# Altium PCB PCB_国产飞控-led端子-copy-copy_2026-03-31.pcbdoc (part 1 of 3)
Units mil, origin at the board's own origin, x right, y up, seen from the top; angles counter-clockwise.
Board outline 3997.5 x 3500.13 mil, 2 copper layers (Top Layer, Bottom Layer); 108 components, 113 nets, 523 pads, 148 vias.
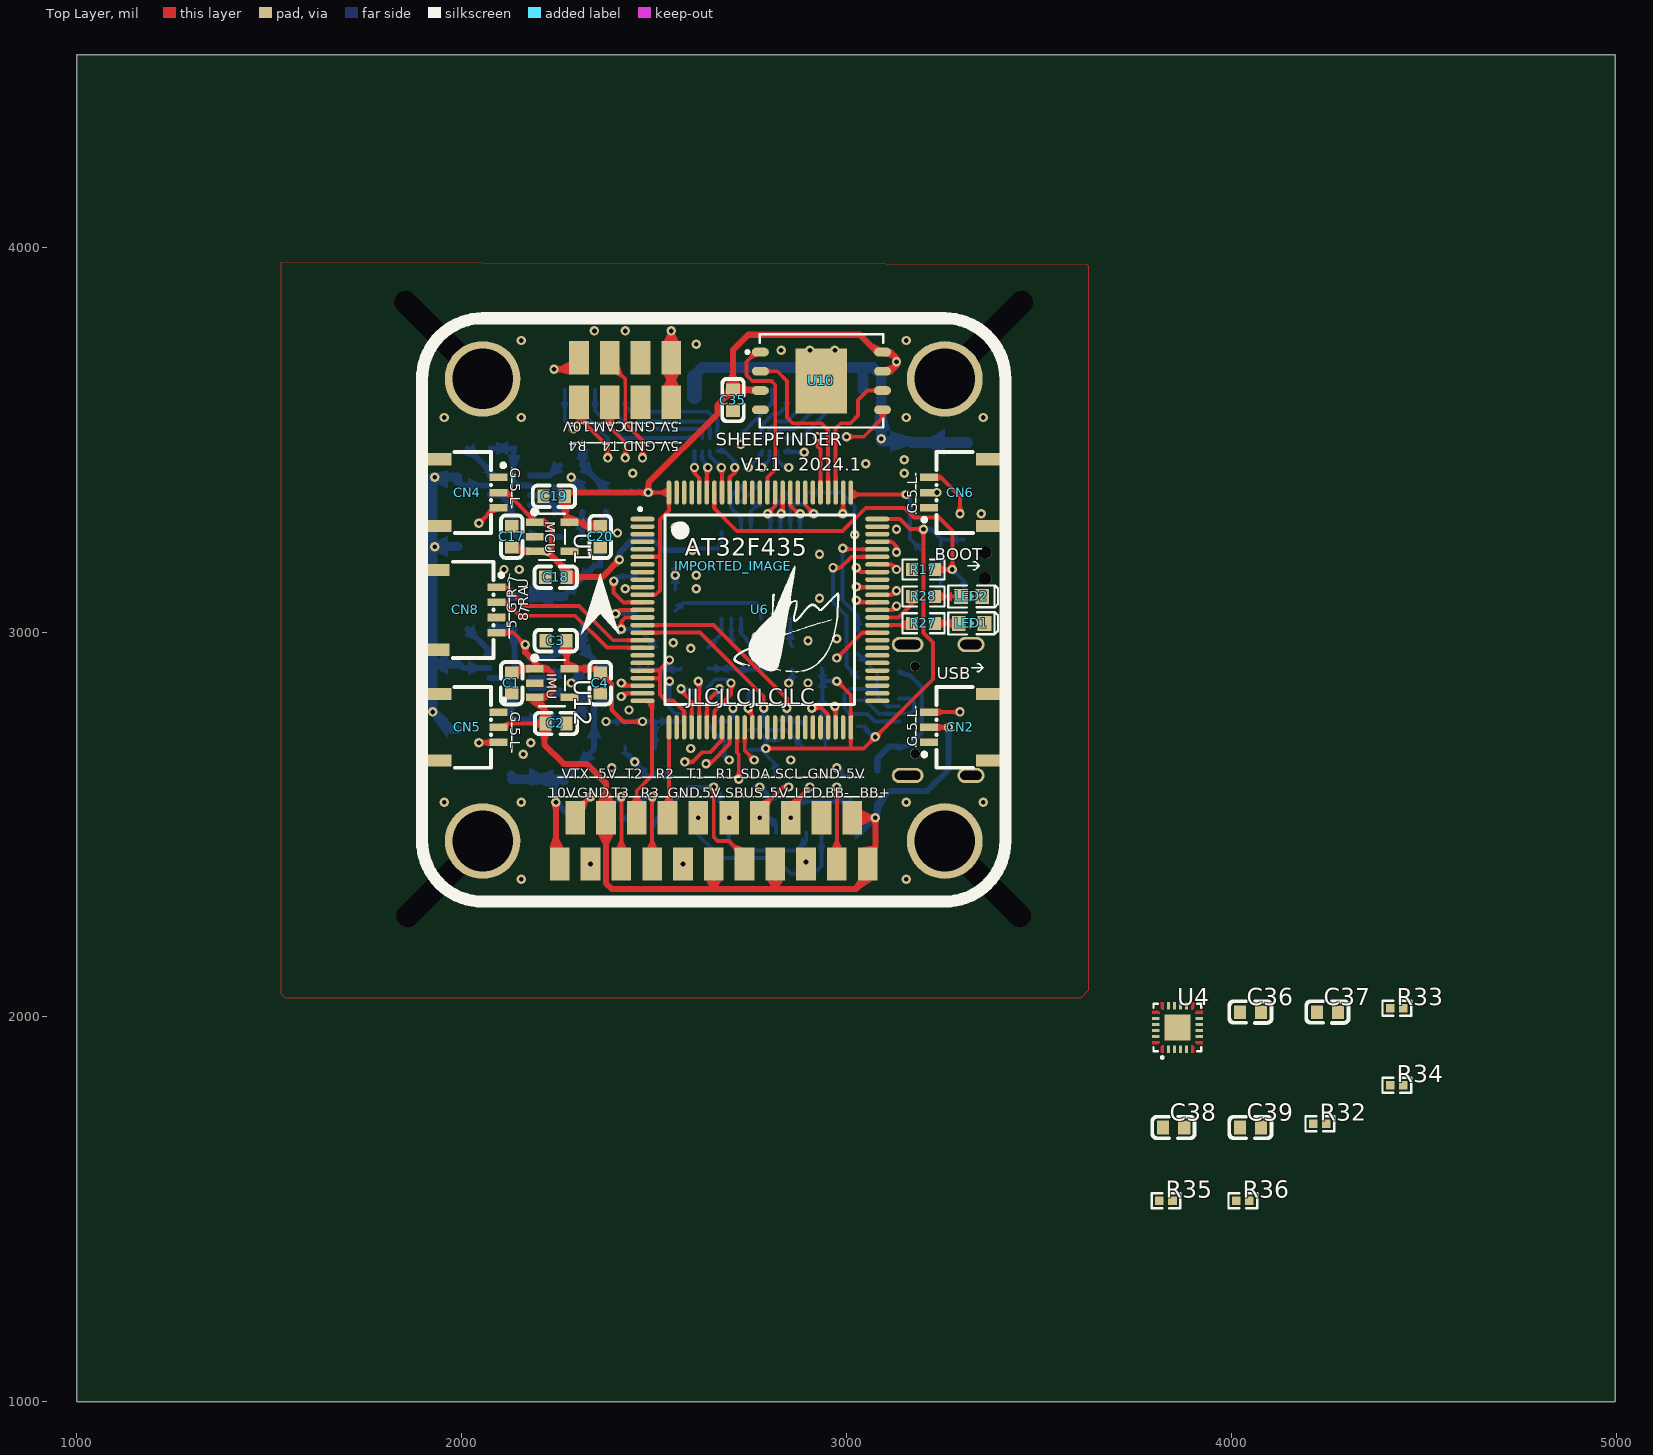
[diagram p0: Top Layer view]
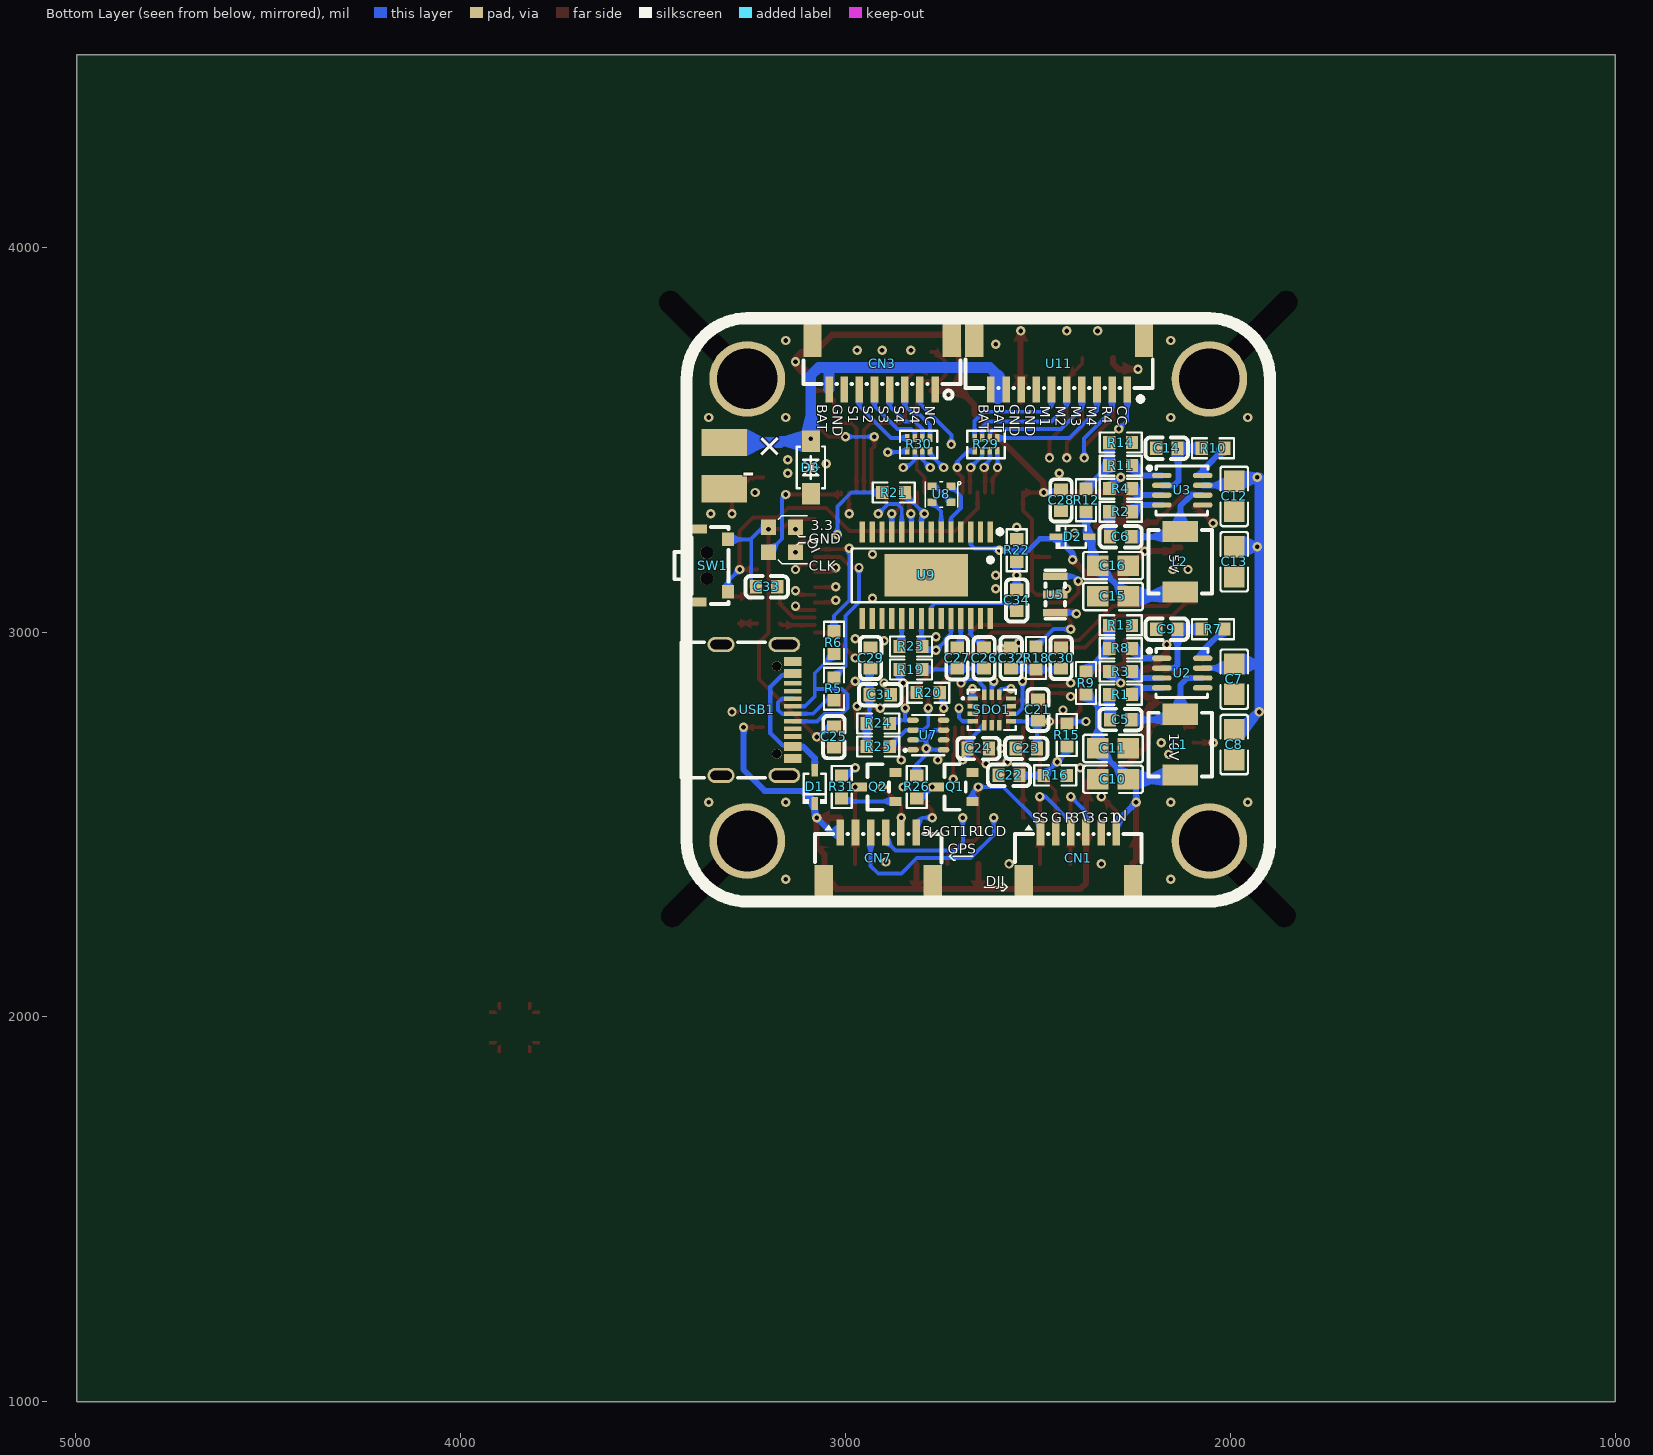
[diagram p1: Bottom Layer view, seen from below]

## Layer stack, top to bottom
Top Layer: signal copper (thickness not stored)
Dielectric: dielectric 12.6, FR-4, Dk 4.8
Bottom Layer: signal copper (thickness not stored)

## Board outline
4997.5,1000 1000,1000 1000,4500.13 4997.5,4500.13
cut-out: 2034.12,3636.75 1834.12,3836.75 cw(c1855.14,3857.49) 1875.88,3878.51 2075.88,3678.51 cw(c2054.86,3657.77) 2034.12,3636.75
cut-out: 3234.12,3678.51 3434.12,3878.51 cw(c3454.86,3857.49) 3475.88,3836.75 3275.88,3636.75 cw(c3255.14,3657.77) 3234.12,3678.51
cut-out: 3275.88,2478.51 3470.88,2283.51 cw(c3449.86,2262.77) 3429.12,2241.75 3234.12,2436.75 cw(c3255.14,2457.49) 3275.88,2478.51
cut-out: 2075.88,2436.75 1880.88,2241.75 cw(c1860.14,2262.77) 1839.12,2283.51 2034.12,2478.51 cw(c2054.86,2457.49) 2075.88,2436.75

## Components (designator, comment, footprint, x,y, rotation, side; value= is the part's Value field where it differs from the comment)
C1 "100nF" C0603#1 2130,2867.63 r90 top
C2 "10uF" C0603#1 2245,2762.63 r180 top
C3 "10uF" C0603#1 2245,2977.63 r0 top
C4 "100nF" C0603#1 2360,2867.63 r90 top
C5 "100nF" C0603#2 2285,2772.63 r0 bottom
C6 "100nF" C0603#2 2285,3247.63 r0 bottom
C7 "22u" C0805 1990,2877.63 r270 bottom
C8 "22u" C0805 1990,2707.63 r270 bottom
C9 "100nF" C0603#2 2165,3007.63 r0 bottom
C10 "22u" C0805 2305,2617.63 r0 bottom
C11 "22u" C0805 2305,2697.63 r180 bottom
C12 "22u" C0805 1990,3352.63 r270 bottom
C13 "22u" C0805 1990,3182.63 r270 bottom
C14 "100nF" C0603#2 2165,3477.63 r0 bottom
C15 "22u" C0805 2305,3092.63 r0 bottom
C16 "22u" C0805 2305,3172.63 r180 bottom
C17 "100nF" C0603#1 2130.3,3247.63 r270 top
C18 "10uF" C0603#1 2244.7,3142.63 r0 top
C19 "10uF" C0603#1 2240.3,3352.63 r0 top
C20 "100nF" C0603#1 2360.3,3247.63 r90 top
C21 "10nF" C0603#2 2500,2797.63 r90 bottom
C22 "100nF" C0603#2 2575,2627.63 r0 bottom
C23 "100nF" C0603#2 2530,2697.63 r0 bottom
C24 "2.2uF" C0603#2 2655,2697.63 r180 bottom
C25 "100nF" C0603#2 3030,2727.63 r270 bottom
C26 "10uF" C0603#2 2640,2932.63 r270 bottom
C27 "10uF" C0603#2 2710,2932.63 r270 bottom
C28 "100nF" C0603#2 2440,3342.63 r270 bottom
C29 "100nF" C0603#2 2935,2932.63 r90 bottom
C30 "100nF" C0603#2 2440,2932.63 r90 bottom
C31 "100nF" C0603#2 2910,2837.63 r180 bottom
C32 "100nF" C0603#2 2570,2932.63 r90 bottom
C33 "100nF" C0603#2 3205,3117.63 r180 bottom
C34 "100nF" C0603#2 2555,3082.63 r270 bottom
C35 "100nF" C0603#1 2705,3602.63 r270 top
C36 "100nF" C0603#1 4050,2012.63 r0 top
C37 "100nF" C0603#1 4250,2012.63 r0 top
C38 "100nF" C0603#1 3850,1712.63 r0 top
C39 "2.2uF" C0603#1 4050,1712.63 r0 top
CN1 "SH1.0X6P" CONN-SMD_6P-P1.00_MEGASTAR_ZX-SH1.0-6PWT 2395,2412.63 r0 bottom
CN2 "SH1.0-3P" CONN-SMD_3P-P1.00_HDGC_HDGC1002WR-S-3P 3295,2752.63 r90 top
CN3 "SH1.0X8P" CONN-SMD_8P-P1.00_WAFER-SH1.0-8PWB 2905,3697.63 r180 bottom
CN4 "SH1.0-3P" CONN-SMD_3P-P1.00_HDGC_HDGC1002WR-S-3P 2015,3362.63 r270 top
CN5 "SH1.0-3P" CONN-SMD_3P-P1.00_HDGC_HDGC1002WR-S-3P 2015,2752.63 r270 top
CN6 "SH1.0-3P" CONN-SMD_3P-P1.00_HDGC_HDGC1002WR-S-3P 3295,3362.63 r90 top
CN7 "SH1.0X6P" CONN-SMD_6P-P1.00_MEGASTAR_ZX-SH1.0-6PWT 2915,2412.63 r0 bottom
CN8 "HDGC1002WR-S-4P" CONN-SMD_4P-P1.00_HDGC_HDGC1002WR-S-4P 2010,3057.63 r270 top
D1 "B5817WS-MS" SOD-323_L1.7-W1.3-LS2.7-FD 3080,2597.63 r90 bottom
D2 "B5817WS-MS" SOD-323_L1.7-W1.3-LS2.7-FD 2410,3247.63 r180 bottom
D3 "SMF28CA" SOD-123_L2.7-W1.8-LS3.7-BI 3090,3427.63 r90 bottom
IMPORTED_IMAGE "IMPORTED_IMAGE" IMPORTED_IMAGE 2705.26,3171.44 r0 top
L1 "10uH" IND-SMD_L4.4-W4.0_PHC0420 2130,2707.63 r90 bottom
L2 "10uH" IND-SMD_L4.4-W4.0_PHC0420 2130,3182.63 r90 bottom
LED1 "LED-0603_G" LED0603_GREEN 3325,3022.63 r0 top
LED2 "LED-0603_B" LED0603_BLUE 3325.03,3092.6 r0 top
Q1 "S8050LT1-J3Y" SOT-23_L2.9-W1.3-P1.90-LS2.4-BR 2715,2597.63 r0 bottom
Q2 "S8050LT1-J3Y" SOT-23_L2.9-W1.3-P1.90-LS2.4-BR 2915,2597.63 r0 bottom
R1 "20R" R0603#1 2285,2837.63 r180 bottom
R2 "20R" R0603#1 2285,3312.63 r180 bottom
R3 "1M" R0603#1 2285,2897.63 r180 bottom
R4 "1M" R0603#1 2285,3372.63 r180 bottom
R5 "22R" R0603#1 3030,2852.63 r270 bottom
R6 "22R" R0603#1 3030,2972.63 r270 bottom
R7 "100k" R0603#1 2045,3007.63 r0 bottom
R8 "51k" R0603#1 2285,2957.63 r180 bottom
R9 "41.2k" R0603#1 2375,2867.63 r90 bottom
R10 "100k" R0603#1 2045,3477.63 r0 bottom
R11 "51k" R0603#1 2285,3432.63 r180 bottom
R12 "41.2k" R0603#1 2375,3342.63 r90 bottom
R13 "3.6k" R0603#1 2285,3017.63 r180 bottom
R14 "7.68k" R0603#1 2285,3492.63 r180 bottom
R15 "10k" R0603#1 2425,2732.63 r270 bottom
R16 "1k" R0603#1 2455,2627.63 r180 bottom
R17 "10k" R0603#2 3200,3162.63 r180 top
R18 "10k" R0603#1 2505,2932.63 r90 bottom
R19 "75R" R0603#1 2830,2902.63 r180 bottom
R20 "10k" R0603#1 2785,2842.63 r0 bottom
R21 "10k" R0603#1 2875,3362.63 r0 bottom
R22 "75R" R0603#1 2555,3212.63 r90 bottom
R23 "10k" R0603#1 2830,2962.63 r0 bottom
R24 "4K7" R0603#1 2915,2762.63 r180 bottom
R25 "4K7" R0603#1 2915,2702.63 r180 bottom
R26 "1k" R0603#1 2815,2597.63 r270 bottom
R27 "1k" R0603#2 3200,3022.63 r180 top
R28 "1k" R0603#2 3200,3092.63 r180 top
R29 "100*4" RES-ARRAY-SMD_0402-8P-L2.0-W1.0-BL 2635,3487.63 r180 bottom
R30 "100*4" RES-ARRAY-SMD_0402-8P-L2.0-W1.0-BL 2810,3487.63 r180 bottom
R31 "1k" R0603#1 3010,2597.63 r90 bottom
R32 "10kΩ" R0402 4230,1722.63 r0 top
R33 "10kΩ" R0402 4430,2022.63 r0 top
R34 "10kΩ" R0402 4430,1822.63 r0 top
R35 "10kΩ" R0402 3830,1522.63 r0 top
R36 "10kΩ" R0402 4030,1522.63 r0 top
SDO1 "BMI270" LGA-14_L3.0-W2.5-P0.50-TL 2620,2797.63 r0 bottom
SW1 "TS-1073B-A2B2-D4" KEY-SMD_TS-1073B-A2B2-D4 3345,3172.63 r270 bottom
U1 "SPX3819M5-L-3-3/TR" SOT-23-5_L3.0-W1.7-P0.95-LS2.8-BL 2235,3247.63 r270 top
U2 "MP9943" QFN-8-3X3 2125,2892.63 r0 bottom
U3 "MP9943" QFN-8-3X3 2125,3367.63 r0 bottom
U4 "MPU6500" QFN-24_L3.0-W3.0-P0.40-BL-EP 3860,1972.63 r0 top
U5 "8M/3213" X3213 2455,3097.63 r270 bottom
U6 "AT32F437VMT7-LQFP100" LQFP-100_L14.0-W14.0-P0.50-LS16.0-TL 2775,3057.63 r0 top
U7 "BMP280" SENSOR-TH_BMP280-BL 2785,2732.63 r0 bottom
U8 "2016晶振/27M" 2016晶振 2750,3357.63 r180 bottom
U9 "AT7456E" TSSOP-28_L9.7-W4.4-P0.65-LS6.4-BL-EP5.5 2790,3147.63 r180 bottom
U10 "W25N01GVZEIG" WSON-8_L8.0-W6.10-P1.27-EP 2935,3652.63 r0 top
U11 "ZX-SH1.0-10PWT" CONN-SMD_10P-P1.00_ZX-SH1.0-10PWT 2445,3697.63 r180 bottom
U12 "SPX3819M5-L-3-3/TR" SOT-23-5_L3.0-W1.7-P0.95-LS2.8-BL 2235,2867.63 r270 top
USB1 "TYPEC-304A-16L" USB-C-SMD_XUNPU_TYPEC-304A-ACP16L 3230,2797.63 r90 bottom

## Footprints (in the part's own frame and the unit in brackets; to place one, negate y for a bottom-side part, rotate by r counter-clockwise, add the part's x,y. Pads: shape width x height; smd on the part's side, far side on the other; paste and mask are expansions set on the pad)
2016晶振 [mm]
  rect 0.6x0.5 smd paste+0 mask+0.102: 1(0.6,0.55) 2(-0.65,0.55) 3(-0.65,-0.5) 4(0.6,-0.5)
  silkscreen extent -1.1,-0.85 1.25,0.85
C0603#1 [mm]
  rect 0.8x0.9 smd paste+0 mask+0.051: 1(-0.7,0) 2(0.7,0)
  silkscreen extent -1.41,-0.71 1.39,0.72
C0603#2 [mm]
  rect 0.8x0.9 smd paste+0 mask+0.051: 1(0.7,0) 2(-0.7,0)
  silkscreen extent -1.39,-0.72 1.41,0.71
C0805 [mm]
  rect 1.41x1.35 smd paste-100 mask+0.051: 1(1,0) 2(-1,0)
  silkscreen extent -1.96,-0.9 1.96,0.9
CONN-SMD_3P-P1.00_HDGC_HDGC1002WR-S-3P [mm]
  rect 0.5x1.2 smd paste+0 mask+0.05: 1(-1,2.05) 2(0,2.05) 3(1,2.05)
  rect 0.8x2 smd paste+0 mask+0.05: 4(2.2,-2.05) 5(-2.2,-2.05)
  silkscreen extent -2.67,-2.72 2.67,2.48
CONN-SMD_4P-P1.00_HDGC_HDGC1002WR-S-4P [mm]
  rect 0.5x1.2 smd paste+0 mask+0.05: 1(-1.5,2.05) 2(-0.5,2.05) 3(0.5,2.05) 4(1.5,2.05)
  rect 0.8x2 smd paste+0 mask+0.05: 5(2.625,-2.05) 6(-2.625,-2.05)
  silkscreen extent -3.18,-2.72 3.17,2.49
CONN-SMD_6P-P1.00_MEGASTAR_ZX-SH1.0-6PWT [mm]
  rect 0.5x1.7 smd paste+0 mask+0.05: 1(2.5,-1.7) 2(1.5,-1.7) 3(0.5,-1.7) 4(-0.5,-1.7) 5(-1.5,-1.7) 6(-2.5,-1.7)
  rect 1.2x2.5 smd paste+0 mask+0.05: 7(-3.6,1.7) 8(3.6,1.7)
  silkscreen extent -4.18,-2.21 4.17,2.7
CONN-SMD_8P-P1.00_WAFER-SH1.0-8PWB [mm]
  rect 0.5x1.7 smd paste+0 mask+0.05: 1(3.5,-1.7) 2(2.5,-1.7) 3(1.5,-1.7) 4(0.5,-1.7) 5(-0.5,-1.7) 6(-1.5,-1.7) 7(-2.5,-1.7) 8(-3.5,-1.7)
  rect 1.2x2.5 smd paste+0 mask+0.05: 9(4.6,1.7) 10(-4.6,1.7)
  silkscreen extent -5.17,-2.32 5.17,2.95
CONN-SMD_10P-P1.00_ZX-SH1.0-10PWT [mm]
  rect 0.5x1.7 smd paste+0 mask+0.05: 1(4.5,-1.7) 2(3.5,-1.7) 3(2.5,-1.7) 4(1.5,-1.7) 5(0.5,-1.7) 6(-0.5,-1.7) 7(-1.5,-1.7) 8(-2.5,-1.7) 9(-3.5,-1.7) 10(-4.5,-1.7)
  rect 1.2x2.5 smd paste+0 mask+0.05: 11(-5.6,1.7) 12(5.6,1.7)
  silkscreen extent -6.18,-2.64 6.18,2.7
IMPORTED_IMAGE [mil]
  silkscreen extent 0,-275 276,0
IND-SMD_L4.4-W4.0_PHC0420 [mm]
  rect 1.4x2.35 smd paste+0 mask+0.051: 1(2,0) 2(-2,0)
  silkscreen extent -2.1,-2.1 2.1,2.1
KEY-SMD_TS-1073B-A2B2-D4 [mm]
  rect 0.9x0.8 smd paste+0 mask+0.051: 1(1.718,1.013) 2(-1.732,1.013)
  rect 0.6x1.2 smd paste+0 mask+0.051: 3(2.407,-1.013) 4(-2.407,-0.987)
  round 0.85 hole 0.85 unplated paste+0: ""(-0.857,-0.387) ""(0.843,-0.387)
  silkscreen extent -2.55,-2.53 2.53,1.03
LED0603_BLUE [mm]
  rect 0.9x1 smd paste+0 mask+0.051: 1(-0.7,0) 2(0.7,0)
  silkscreen extent -1.54,-0.73 1.75,0.73
LED0603_GREEN [mm]
  rect 0.9x1 smd paste+0 mask+0.051: 1(-0.85,0) 2(0.85,0)
  silkscreen extent -1.54,-0.73 1.75,0.73
LGA-14_L3.0-W2.5-P0.50-TL [mm]
  rect 0.675x0.28 smd paste+0 mask+0.051: 1(1.262,-0.75) 2(1.262,-0.25) 3(1.262,0.25) 4(1.262,0.75) 8(-1.262,0.75) 9(-1.262,0.25) 10(-1.262,-0.25) 11(-1.262,-0.75)
  rect 0.28x0.675 smd paste+0 mask+0.051: 5(0.5,1.012) 6(0,1.012) 7(-0.5,1.012) 12(-0.5,-1.012) 13(0,-1.012) 14(0.5,-1.012)
  silkscreen extent -1.58,-1.33 1.98,1.33
LQFP-100_L14.0-W14.0-P0.50-LS16.0-TL [mm]
  oval 1.6x0.3 smd paste+0 mask+0.051: 1(-7.75,6) 2(-7.75,5.5) 3(-7.75,5) 4(-7.75,4.5) 5(-7.75,4) 6(-7.75,3.5) 7(-7.75,3) 8(-7.75,2.5) 9(-7.75,2) 10(-7.75,1.5) 11(-7.75,1) 12(-7.75,0.5) 13(-7.75,0) 14(-7.75,-0.5) 15(-7.75,-1) 16(-7.75,-1.5) 17(-7.75,-2) 18(-7.75,-2.5) 19(-7.75,-3) 20(-7.75,-3.5) 21(-7.75,-4) 22(-7.75,-4.5) 23(-7.75,-5) 24(-7.75,-5.5) 25(-7.75,-6) 51(7.75,-6) 52(7.75,-5.5) 53(7.75,-5) 54(7.75,-4.5) 55(7.75,-4) 56(7.75,-3.5) 57(7.75,-3) 58(7.75,-2.5) 59(7.75,-2) 60(7.75,-1.5) 61(7.75,-1) 62(7.75,-0.5) 63(7.75,0) 64(7.75,0.5) 65(7.75,1) 66(7.75,1.5) 67(7.75,2) 68(7.75,2.5) 69(7.75,3) 70(7.75,3.5) 71(7.75,4) 72(7.75,4.5) 73(7.75,5) 74(7.75,5.5) 75(7.75,6)
  oval 0.3x1.6 smd paste+0 mask+0.051: 26(-6,-7.75) 27(-5.5,-7.75) 28(-5,-7.75) 29(-4.5,-7.75) 30(-4,-7.75) 31(-3.5,-7.75) 32(-3,-7.75) 33(-2.5,-7.75) 34(-2,-7.75) 35(-1.5,-7.75) 36(-1,-7.75) 37(-0.5,-7.75) 38(0,-7.75) 39(0.5,-7.75) 40(1,-7.75) 41(1.5,-7.75) 42(2,-7.75) 43(2.5,-7.75) 44(3,-7.75) 45(3.5,-7.75) 46(4,-7.75) 47(4.5,-7.75) 48(5,-7.75) 49(5.5,-7.75) 50(6,-7.75) 76(6,7.75) 77(5.5,7.75) 78(5,7.75) 79(4.5,7.75) 80(4,7.75) 81(3.5,7.75) 82(3,7.75) 83(2.5,7.75) 84(2,7.75) 85(1.5,7.75) 86(1,7.75) 87(0.5,7.75) 88(0,7.75) 89(-0.5,7.75) 90(-1,7.75) 91(-1.5,7.75) 92(-2,7.75) 93(-2.5,7.75) 94(-3,7.75) 95(-3.5,7.75) 96(-4,7.75) 97(-4.5,7.75) 98(-5,7.75) 99(-5.5,7.75) 100(-6,7.75)
  silkscreen extent -8,-6.25 6.25,6.75
QFN-8-3X3 [mm]
  oval 1.3x0.35 smd paste+0 mask+0.051: 1(1.349,-1.001) 2(1.349,-0.351) 3(1.349,0.3) 4(1.349,0.95) 5(-1.346,0.95) 6(-1.346,0.3) 7(-1.346,-0.351) 8(-1.349,-1.001)
  silkscreen extent -1.68,-1.64 2.29,1.6
QFN-24_L3.0-W3.0-P0.40-BL-EP [mm]
  rect 0.2x0.505 smd paste-100 mask+0.051: 2(-0.6,-1.428) 3(-0.2,-1.428) 4(0.2,-1.428) 5(0.6,-1.428) 14(0.6,1.428) 15(0.2,1.428) 16(-0.2,1.428) 17(-0.6,1.428)
  rect 0.505x0.2 smd paste-100 mask+0.051: 8(1.428,-0.6) 9(1.428,-0.2) 10(1.428,0.2) 11(1.428,0.6) 20(-1.428,0.6) 21(-1.428,0.2) 22(-1.428,-0.2) 23(-1.428,-0.6)
  rect 1.7x1.7 smd paste-100 mask+0.051: 25(0,0)
  Top Layer region: -1.1,1.68 -0.9,1.68 -0.9,1.175 -1,1.174 -1.1,1.274
  Top Layer region: -1.68,-1.1 -1.274,-1.1 -1.174,-1 -1.175,-0.9 -1.68,-0.9
  Top Layer region: 1.68,-1.1 1.275,-1.1 1.175,-1 1.175,-0.9 1.68,-0.9
  Top Layer region: 1.68,1.1 1.274,1.1 1.174,1 1.175,0.9 1.68,0.9
  Top Layer region: 1.1,1.68 0.9,1.68 0.9,1.175 1,1.174 1.1,1.274
  Top Layer region: -1.1,-1.68 -0.9,-1.68 -0.9,-1.175 -1,-1.174 -1.1,-1.275
  Top Layer region: 1.1,-1.68 0.9,-1.68 0.9,-1.175 1,-1.175 1.1,-1.275
  Top Layer region: -1.68,1.1 -1.274,1.1 -1.174,1 -1.175,0.9 -1.68,0.9
  silkscreen extent -1.58,-2.05 1.58,1.58
R0402 [mm]
  rect 0.566x0.54 smd paste-100 mask+0.051: 1(-0.433,0) 2(0.433,0)
  silkscreen extent -0.94,-0.5 0.94,0.5
R0603#1 [mil]
  rect 31.75x34.02 smd paste-3937.01 mask+2: 1(29.66,0) 2(-29.66,0)
  silkscreen extent -55,-26 55,26
R0603#2 [mil]
  rect 31.75x34.02 smd paste-3937.01 mask+2: 1(-29.66,0) 2(29.66,0)
  silkscreen extent -55,-26 55,26
RES-ARRAY-SMD_0402-8P-L2.0-W1.0-BL [mm]
  rect 0.3x0.505 smd paste+0 mask+0.051: 1(0.75,-0.427) 2(0.25,-0.427) 3(-0.25,-0.427) 4(-0.75,-0.427) 5(-0.75,0.428) 6(-0.25,0.428) 7(0.25,0.428) 8(0.75,0.428)
  silkscreen extent -1.23,-0.91 1.23,0.91
SENSOR-TH_BMP280-BL [mm]
  oval 0.767x0.364 smd paste+0 mask+0.051: 1(1.008,0.975) 2(1.008,0.325) 3(1.008,-0.325) 4(1.008,-0.975) 5(-1.009,-0.975) 6(-1.009,-0.325) 7(-1.009,0.325) 8(-1.009,0.975)
  silkscreen extent -1.08,-1.33 1.61,1.33
SOD-123_L2.7-W1.8-LS3.7-BI [mm]
  rect 1.4x1.2 smd paste+0 mask+0.051: 1(1.735,0) 2(-1.735,0)
  silkscreen extent -1.38,-0.93 1.38,0.93
SOD-323_L1.7-W1.3-LS2.7-FD [mm]
  rect 0.845x0.455 smd paste+0 mask+0.051: 1(1.098,0) 2(-1.098,0)
  silkscreen extent -1.1,-0.8 0.88,0.8
SOT-23-5_L3.0-W1.7-P0.95-LS2.8-BL [mm]
  rect 0.49x1.157 smd paste+0 mask+0.051: 1(-0.95,-1.154) 2(0,-1.154) 3(0.95,-1.154)
  rect 0.49x1.175 smd paste+0 mask+0.051: 4(0.95,1.154) 5(-0.95,1.154)
  silkscreen extent -1.8,-1.29 1.53,0.85
SOT-23_L2.9-W1.3-P1.90-LS2.4-BR [mm]
  rect 0.8x0.6 smd paste+0 mask+0.051: 1(-1.15,0.95) 2(-1.15,-0.95) 3(1.15,0)
  silkscreen extent -0.7,-1.5 0.7,1.5
TSSOP-28_L9.7-W4.4-P0.65-LS6.4-BL-EP5.5 [mm]
  rect 0.35x1.4 smd paste+0 mask+0.051: 1(4.225,2.85) 2(3.575,2.85) 3(2.925,2.85) 4(2.275,2.85) 5(1.625,2.85) 6(0.975,2.85) 7(0.325,2.85) 8(-0.325,2.85) 9(-0.975,2.85) 10(-1.625,2.85) 11(-2.275,2.85) 12(-2.925,2.85) 13(-3.575,2.85) 14(-4.225,2.85) 15(-4.225,-2.85) 16(-3.575,-2.85) 17(-2.925,-2.85) 18(-2.275,-2.85) 19(-1.625,-2.85) 20(-0.975,-2.85) 21(-0.325,-2.85) 22(0.325,-2.85) 23(0.975,-2.85) 24(1.625,-2.85) 25(2.275,-2.85) 26(2.925,-2.85) 27(3.575,-2.85) 28(4.225,-2.85)
  rect 5.5x2.8 smd paste+0 mask+0.05: 29(0,0)
  silkscreen extent -4.93,-1.77 5,3.02
USB-C-SMD_XUNPU_TYPEC-304A-ACP16L [mm]
  oval 1x2.1 hole 0.6 slot 1.7 at 90 deg paste+0 mask+0.05: 25(-4.32,-1.808) 28(4.32,-1.808)
  oval 1x1.8 hole 0.6 slot 1.4 at 90 deg paste+0 mask+0.05: 26(-4.32,2.372) 27(4.32,2.372)
  rect 0.3x1.15 smd paste-100 mask+0.05: A1(3.35,-2.373) A4(2.55,-2.373) A5(1.25,-2.373) A6(0.25,-2.373) A7(-0.25,-2.373) A8(-1.25,-2.373) A9(-2.55,-2.373) A12(-3.35,-2.373) B1(-3.05,-2.373) B4(-2.25,-2.373) B5(-1.75,-2.373) B6(-0.75,-2.373) B7(0.75,-2.373) B8(1.75,-2.373) B9(2.25,-2.373) B12(3.05,-2.373)
  round 0.65 hole 0.65 unplated paste+0: ""(-2.89,-1.308) ""(2.89,-1.308)
  silkscreen extent -4.47,-0.54 4.47,4.97
WSON-8_L8.0-W6.10-P1.27-EP [mm]
  oval 1.115x0.581 smd paste+0 mask+0.051: 1(-4.033,1.905) 2(-4.033,0.635) 3(-4.033,-0.635) 4(-4.033,-1.905) 5(4.033,-1.905) 6(4.033,-0.635) 7(4.033,0.635) 8(4.033,1.905)
  rect 3.4x4.3 smd paste+0 mask+0.051: 9(0,0)
  silkscreen extent -4.99,-3.08 4.08,3.08
X3213 [mm]
  rect 0.5x1.6 smd paste+0 mask+0.051: 1(1.199,0) 2(0,0) 3(-1.199,0)
  silkscreen extent -1.6,-0.65 1.6,0.65

## Free pads (board coordinates)
  rect 51.18x86.61 smd paste-3937.01 mask+2: 5(2255,2397.63) 5(2295,2517.63) 5(2305,3597.63) 5(2305,3712.63) 5(2335,2397.63) 5(2375,2517.63) 5(2385,3597.63) 5(2385,3712.63) 5(2415,2397.63) 5(2455,2517.63) 5(2465,3597.63) 5(2465,3712.63) 5(2495,2397.63) 5(2535,2517.63) 5(2545,3597.63) 5(2545,3712.63) 5(2575,2397.63) 5(2615,2517.63) 5(2655,2397.63) 5(2695,2517.63) 5(2735,2397.63) 5(2775,2517.63) 5(2815,2397.63) 5(2855,2517.63) 5(2895,2397.63) 5(2935,2517.63) 5(2975,2397.63) 5(3015,2517.63) 5(3055,2397.63)
  rect 39.37x39.37 smd far side paste-3937.01 mask+2: 5(3130,3207.63) 5(3130,3272.63) 5(3200,3207.63) 5(3200,3272.63)
  rect 118.11x70.87 smd far side paste-3937.01 mask+2: 5(3315,3372.63) 5(3315,3492.63)
  round 196.85 hole 157.48 paste+0 mask+1.97: 6(2054.61,3658.02) 6(2054.61,2457.24) 6(3255.39,2457.24) 6(3255.39,3658.02)

## Via types
v1: diameter 24.41, hole 12.2, Top Layer to Bottom Layer, tented both sides, 148 vias

## Nets (pads, with @x,y where several pads share a name; then routed paths per layer and width w, separated by ;. In a path a pad name is that pad's centre, name@x,y a point inside that pad or via, vN(x,y) a via of type N, cw(c..) or ccw(c..) an arc to the next point about the centre after c; other vN are vias at no path point)
1: pad.6@2054.61,3658.02
2: pad.6@3255.39,3658.02
3: pad.6@2054.61,2457.24
3V3-IMU: C3.2 C4.2 C21.2 C23.2 C24.2 C36.1 C37.1 C39.1 R34.2 R35.2 R36.2 SDO1.5 SDO1.8 U4.8 U12.5 | length 911.9
  Top Layer w11.81: C4.2@2360,2895.18 2390,2865.23 2390,2797.63 2420,2767.63 v1(2470,2767.63)
  Top Layer w15.75: C3.2@2272.55,2977.63 2272.6,2918.63 2286.2,2905.03 2350.2,2905.03 C4.2@2360,2895.18
  Mid-Layer 2 w10: v1(2470,2767.63) 2515,2722.63 2640,2722.63 v1(2695,2667.63)
  Bottom Layer w10: v1(2470,2767.63) 2494.1,2767.63 2494.5,2768.13 SDO1.8@2570.32,2768.1 ; C21.2@2500,2770.03 2502.4,2767.63 C23.2@2502.45,2697.63 ; SDO1.5@2639.7,2757.73 2682.6,2714.93 C24.2@2682.55,2697.63 2682.6,2680.03 v1(2695,2667.63)
4: pad.6@3255.39,2457.24
+5V: C1.2 C2.2 C17.2 C18.2 CN2.2 CN4.2 CN5.2 CN6.2 CN7.1 CN8.4 D1.2 D2.2 pad.5@2375,2517.63 pad.5@2545,3597.63 pad.5@2545,3712.63 pad.5@2655,2397.63 pad.5@2815,2397.63 pad.5@3015,2517.63 pad.5@3055,2397.63 R21.1 R23.2 U1.1 U1.3 U9.3 U9.21 U9.24 U12.1 U12.3 | length 6826.7
  Top Layer w10: CN5.2@2095.71,2752.63 2110,2752.63 2120,2762.63 C2.2@2217.45,2762.63 ; CN4.2@2095.71,3362.63 2116.2,3362.63 U1.1@2193.8,3285.03 ; CN2.2@3214.29,2752.63 v1(3265,2752.63)
  Top Layer w10.04: CN8.4@2090.7,2998.53 2134.1,2998.53 v1(2165,2967.63)
  Top Layer w15.75: C1.2@2130,2895.18 2142.6,2895.23 2152.4,2905.03 U12.1@2183.8,2905.03 ; C17.2@2130.3,3220.03 2142.6,3220.03 2152.4,3210.23 2183.5,3210.23 2222.6,3210.23 2235,3222.63 2235,3267.63 2217.6,3285.03 U1.1@2193.8,3285.03 ; v1(2165,2967.63) 2165,2947.63 2193.5,2919.13 2193.5,2905.03 2222.6,2905.03 2235,2892.63 2235,2847.63 2217.6,2830.23 2193.5,2830.23 2193.5,2819.13 2217.5,2795.13 2217.5,2762.63 2215,2760.13 2215,2707.63 2265,2657.63 2325,2657.63 2375,2607.63 pad.5@2375,2517.63 2375,2347.63 2390,2332.63 2655,2332.63 ; U1.3@2193.8,3210.23 v1(2222.4,3210.23) 2272.3,3160.33 2272.3,3142.63 2365,3142.63 v1(2410,3187.63) ; pad.5@2545,3597.63 pad.5@2545,3712.63 2545,3737.63 v1(2545,3782.63) ; pad.5@2655,2397.63 2655,2332.63 ; 2815,2332.63 pad.5@2815,2397.63 ; pad.5@3015,2517.63 v1(3075,2517.63) 3075,2442.63 3055,2422.63 pad.5@3055,2397.63 3055,2362.63 3025,2332.63 2655,2332.63
  Mid-Layer 1 w10: v1(2600,3212.63) 2645,3167.63 2645,3072.63 v1(2765,2952.63) ; v1(3021.06,3252.7) 3086,3317.63 3235,3317.63 v1(3235,3362.63)
  Mid-Layer 1 w15.75: v1(3235,3362.63) 3235,2782.63 v1(3265,2752.63)
  Mid-Layer 2 w10.08: 2600,3277.63 2675,3352.63 2995,3352.63 3021.1,3326.53 v1(3021.06,3252.7)
  Mid-Layer 2 w15.75: v1(2165,2967.63) 2165,3027.63 2222.4,3085.03 v1(2222.4,3210.23) ; v1(2545,3782.63) 2545,3537.63 2570,3512.63 2570,3307.63 2600,3277.63 v1(2600,3212.63)
  Bottom Layer w10: v1(2600,3212.63) 2605,3217.63 2665,3217.63 2674.8,3227.43 U9.3@2674.84,3259.83 ; U9.24@2726.02,3035.42 2726,2996.63 2740,2982.63 2740,2977.63 v1(2765,2952.63) 2790.3,2952.63 R23.2@2800.34,2962.63 2802.8,2962.63 U9.21@2802.8,3035.42 ; R21.1@2904.66,3362.63 2985,3362.63 3021.1,3326.53 v1(3021.06,3252.7)
  Bottom Layer w13.78: D2.2@2455,3242.63 2495,3242.63 2525,3212.63 v1(2600,3212.63)
  Bottom Layer w15.75: v1(2410,3187.63) 2410,3204.43 D2.2@2453.21,3247.63 ; CN7.1@3013.4,2479.53 3036.9,2479.53 v1(3075,2517.63) 3080,2522.63 D1.2@3080,2554.42 3113.2,2587.63 3210,2587.63 3265,2642.63 v1(3265,2752.63)
+10V: C10.2 C11.2 CN1.6 L1.2 pad.5@2255,2397.63 pad.5@2305,3712.63 R9.2 | length 1973.6
  Top Layer w15.75: v1(2240,3682.63) 2290,3682.63 2305,3697.63 pad.5@2305,3712.63 ; v1(2245,2557.63) 2245,2407.63 pad.5@2255,2397.63
  Mid-Layer 2 w15.75: v1(2240,3682.63) 2255,3682.63 2255,2567.63 v1(2245,2557.63)
  Bottom Layer w15.75: C10.2@2240,2617.63 2245,2612.63 v1(2245,2557.63) 2296.6,2506.03 CN1.6@2296.6,2479.53 ; C10.2@2265.63,2617.63 2344.4,2696.33 C11.2@2344.37,2697.63 2344.4,2807.33 R9.2@2375,2837.93
  Bottom Layer w23.62: L1.2@2130,2628.89 2130,2617.63 C10.2@2265.63,2617.63 ; C10.2@2265.6,2612.63 C10.2@2265.63,2617.63
AT_CS: R21.2 U6.86 U9.8 | length 180
  Top Layer w10: v1(2795,3307.63) 2814.4,3327.03 U6.86@2814.37,3362.74
  Bottom Layer w10: U9.8@2802.8,3269.83 2802.8,3299.83 v1(2795,3307.63) 2845.3,3357.93 R21.2@2845.34,3362.63
AT_MISO: U6.84 U9.11 | length 117.1
  Top Layer w10: U6.84@2853.74,3362.74 2853.7,3328.93 2875,3307.63 v1(2880,3307.63)
  Bottom Layer w10: U9.11@2879.57,3259.83 2879.6,3307.63 v1(2880,3307.63)
AT_MOSI: U6.85 U9.9 | length 105.3
  Top Layer w10: v1(2830,3307.63) 2834.1,3311.73 U6.85@2834.06,3362.74
  Bottom Layer w10: U9.9@2828.39,3259.83 2828.4,3306.03 v1(2830,3307.63)
AT_SCK: U6.82 U9.10 | length 201.9
  Top Layer w10: U6.82@2893.11,3362.74 2893.1,3329.53 v1(2915,3307.63)
  Bottom Layer w10: U9.10@2853.98,3259.83 2854,3321.63 2865,3332.63 2890,3332.63 v1(2915,3307.63)
BB: pad.5@2975,2397.63 Q2.3 | length 214.8
  Top Layer w10: pad.5@2975,2397.63 v1(2975,2597.63)
  Bottom Layer w10: Q2.3@2960.25,2597.63 v1(2975,2597.63)
BEEPER: R31.1 U6.48 | length 261.4
  Top Layer w10: v1(2970,2807.63) 2971.9,2805.73 U6.48@2971.9,2752.53
  Mid-Layer 1 w10: v1(2970,2807.63) 2975,2802.63 v1(2975,2647.63)
  Bottom Layer w10: v1(2975,2647.63) 2995.3,2627.33 R31.1@3010,2627.28
BOOT0: R17.1 SW1.1 U6.94 | length 949.2
  Top Layer w10: R17.1@3229.66,3162.63 v1(3275,3162.63)
  Top Layer w10.08: U6.94@2656.89,3362.74 2656.9,3320.73 2715,3262.63 2990,3262.63 3050,3322.63 3150,3322.63 3175,3297.63 3240,3297.63 3275,3262.63 v1(3275,3162.63)
  Bottom Layer w10: v1(3275,3162.63) 3305.1,3132.53 SW1.1@3305.11,3104.98
BOX_CS: U6.87 U10.1 | length 455.2
  Top Layer w10: U10.1@2776.23,3727.63 2765,3727.63 2740,3702.63 2740,3667.63 2755,3652.63 2805,3652.63 2815,3642.63 2815,3422.63 2794.7,3402.33 U6.87@2794.69,3362.74
BOX_MISO: U6.79 U10.2 | length 457.4
  Top Layer w10: U10.2@2776.23,3677.63 2820,3677.63 2845,3652.63 2845,3557.63 2860,3542.63 2935,3542.63 2952.2,3525.43 U6.79@2952.17,3362.74
BOX_MOSI: U6.80 U10.5 | length 358.2
  Top Layer w10: v1(2925,3507.63) 2925,3482.63 2932.5,3475.13 U6.80@2932.48,3362.74 ; v1(3000,3507.63) 3045,3507.63 3093.8,3556.43 U10.5@3093.77,3577.63
  Bottom Layer w10: v1(2925,3507.63) v1(3000,3507.63)
BOX_SCK: U6.78 U10.6 | length 352.8
  Top Layer w10: U6.78@2971.9,3362.73 2971.9,3529.53 2985,3542.63 3010,3542.63 3030,3562.63 3030,3602.63 3055,3627.63 U10.6@3093.77,3627.63
C6_1: C6.1 R2.2 | length 65.9
  Bottom Layer w15.75: C6.1@2312.55,3247.63 2312.6,3310.53 R2.2@2314.66,3312.63
C26_2: C26.2 U9.26 | length 89.6
  Bottom Layer w10: C26.2@2640,2960.18 2674.8,2995.03 U9.26@2674.84,3035.42
C27_1: C26.1 C27.1 R19.1 | length 162.7
  Bottom Layer w10: C26.1@2640,2905.03 2710,2905.03 2710,2902.63 R19.1@2800.34,2902.63
C27_2: C27.2 U9.25 | length 79.2
  Bottom Layer w10: U9.25@2700.43,3035.42 2700.4,2969.83 C27.2@2710,2960.18
CURRENT1: U6.36 U11.1 | length 1434.8
  Top Layer w10: U6.36@2735.63,2752.52 2735.6,2692.03 v1(2760,2667.63)
  Mid-Layer 2 w10: v1(2290,3527.63) 2465,3527.63 2510,3482.63 2510,2797.63 2555,2752.63 2675,2752.63 v1(2760,2667.63)
  Bottom Layer w10: U11.1@2267.84,3630.7 2267.8,3549.83 v1(2290,3527.63)
D+: R6.2 U6.71 | length 323
  Top Layer w10: v1(2990,3217.63) 2992.5,3215.13 U6.71@3080.11,3215.11
  Bottom Layer w10: v1(2990,3217.63) 2990,3082.63 3030,3042.63 R6.2@3030,3002.28
D-: R5.2 U6.70 | length 438.8
  Top Layer w10: v1(2965,3167.63) 2985,3167.63 3012.8,3195.43 U6.70@3080.11,3195.43
  Bottom Layer w10: v1(2965,3167.63) 2965,3077.63 3000,3042.63 3000,2912.33 R5.2@3030,2882.28
DN: R5.1 USB1.A7 USB1.B7 | length 225.7
  Bottom Layer w10: R5.1@3030,2822.93 3049.7,2822.93 3084.8,2787.83 USB1.A7@3136.59,2787.79 3164.8,2787.83 3175,2798.03 3175,2817.63 3165.5,2827.13 USB1.B7@3136.6,2827.13
DP: R6.1 USB1.A6 USB1.B6 | length 480
  Bottom Layer w10: R6.1@3030,2942.93 3080,2892.93 3080,2832.63 3105.2,2807.43 USB1.A6@3136.6,2807.43 ; 3080,2852.23 3009.6,2852.23 2995,2837.63 2995,2802.63 3010,2787.63 3055,2787.63 3074.5,2768.13 USB1.B6@3136.59,2768.1
GND: C1.1 C2.1 C3.1 C4.1 C7.1 C8.1 C9.1 C10.1 C11.1 C12.1 C13.1 C14.1 C15.1 C16.1 C17.1 C18.1 C19.1 C20.1 C21.1 C22.1 C23.1 C24.1 C25.1 C28.1 C29.1 C30.1 C31.1 C32.1 C33.1 C35.2 C36.2 C37.2 C38.1 C39.2 CN1.2 CN1.5 CN1.7 CN1.8 CN2.1 CN2.4 CN2.5 CN3.7 CN3.9 CN3.10 CN4.1 CN4.4 CN4.5 CN5.1 CN5.4 CN5.5 CN6.1 CN6.4 CN6.5 CN7.2 CN7.7 CN7.8 CN8.3 CN8.5 CN8.6 D3.2 LED1.2 LED2.2 pad.5@2335,2397.63 pad.5@2465,3597.63 pad.5@2465,3712.63 pad.5@2575,2397.63 pad.5@2935,2517.63 pad.5@3130,3272.63 pad.5@3315,3372.63 Q1.2 Q2.2 R13.1 R14.1 R16.1 R17.2 R20.1 R22.1 R32.1 R33.1 SDO1.6 SDO1.7 U1.2 U2.5 U3.5 U4.20 U4.25 U5.2 U6.10 U6.20 U6.27 U6.74 U6.99 U7.1 U7.5 U7.7 U8.2 U8.4 U9.4 U9.20 U9.23 U10.4 U10.9 U11.7 U11.8 U11.11 U11.12 U12.2 USB1.25 USB1.26 USB1.27 USB1.28 USB1.A1 USB1.A12 USB1.B1 USB1.B12 | length 66.4
  Bottom Layer w10: U8.4@2726.38,3337.95 2767.7,3379.33 U8.2@2775.59,3379.28
  other v1: 2155,2357.63 3155,2357.63 2335,2397.63 2575,2397.63 1955,2557.63 2155,2557.63 3155,2557.63 3355,2557.63 2390,2647.63 2855,2667.63 2160,2682.63 2595,2697.63 2180,2712.63 2435,2797.63 2900,2867.63 2595,2957.63 2550,2972.63 2900,2977.63 2975,2982.63 2765,2987.63 2930,3087.63 2425,3112.63 2610,3112.63 2610,3147.63 2110,3162.63 2150,3162.63 2930,3202.63 2405,3257.63 3130,3267.63 2555,3272.63 3350,3307.63 2445,3412.63 3150,3412.63 3050,3437.63 3150,3447.63 1955,3557.63 2155,3557.63 3155,3557.63 3355,3557.63 2830,3732.63 2905,3732.63 2970,3732.63 2610,3747.63 2155,3757.63 3155,3757.63 2345,3782.63 2425,3782.63
GYRO_CS1: R36.1 SDO1.12 U4.22 U6.29 | length 153.9
  Top Layer w10: v1(2570,2852.63) 2570,2847.63 2597.8,2819.83 U6.29@2597.83,2752.52
  Bottom Layer w10: v1(2570,2852.63) 2595,2852.63 2600.3,2847.33 SDO1.12@2600.32,2837.49
GYRO_EXTI1: SDO1.4 U6.77 | length 837.6
  Top Layer w10: v1(2990,3307.63) 2991.5,3307.63 U6.77@2991.54,3362.74
  Mid-Layer 2 w10: v1(2705,2802.63) 2705,2837.63 2730,2862.63 2730,3207.63 2785,3262.63 2945,3262.63 v1(2990,3307.63)
  Bottom Layer w10: SDO1.4@2669.68,2768.1 2695.5,2768.13 2705,2777.63 v1(2705,2802.63)
GYRO_EXTI2: SDO1.9 U6.60 | length 698.7
  Top Layer w10: v1(2975,2932.63) 3040.9,2998.53 U6.60@3080.1,2998.53
  Mid-Layer 1 w10: v1(2540,2872.63) 2590,2922.63 2890,2922.63 2900,2932.63 v1(2975,2932.63)
  Bottom Layer w10: v1(2540,2872.63) 2540,2802.63 2554.8,2787.83 SDO1.9@2570.32,2787.79
GYRO_MISO: R33.2 SDO1.1 U4.9 U6.31 | length 139.3
  Top Layer w10: U6.31@2637.2,2752.52 2637.2,2819.83 v1(2670,2852.63)
  Bottom Layer w10: SDO1.1@2669.7,2827.13 2670,2827.43 v1(2670,2852.63)
GYRO_MOSI: R34.1 SDO1.14 U6.32 | length 225.6
  Top Layer w10: U6.32@2656.89,2752.52 2656.9,2794.53 2700,2837.63 v1(2700,2867.63)
  Bottom Layer w10: SDO1.14@2639.68,2837.49 2639.7,2857.33 2660,2877.63 2685,2877.63 2695,2867.63 v1(2700,2867.63)
GYRO_SCK: R35.1 SDO1.13 U4.23 U6.30 | length 161.2
  Top Layer w10: v1(2615,2872.63) 2617.5,2870.13 U6.30@2617.52,2752.52
  Bottom Layer w10: v1(2615,2872.63) 2620,2872.63 SDO1.13@2620,2837.49
HEXT_IN: U5.3 U6.12 | length 180.4
  Top Layer w10: v1(2395,3132.63) 2395,3102.63 2420.3,3077.33 U6.12@2469.89,3077.31
  Bottom Layer w10: v1(2395,3132.63) 2407.2,3144.83 U5.3@2455,3144.83
HEXT_OUT: U5.1 U6.13 | length 131.8
  Top Layer w10: v1(2400,3047.63) 2410,3057.63 U6.13@2469.89,3057.63
  Bottom Layer w10: v1(2400,3047.63) 2400,3050.43 U5.1@2455,3050.43
I2C_SCL: CN7.5 pad.5@2855,2517.63 R24.1 U6.15 U7.4 | length 945.5
  Top Layer w10: U6.15@2469.9,3018.23 2654.4,3018.23 2845,2827.63 v1(2845,2802.63) ; v1(2855,2517.63) 2855,2547.63 v1(2905,2597.63)
  Mid-Layer 1 w10: v1(2845,2802.63) 2905,2742.63 v1(2905,2597.63)
  Bottom Layer w10: U7.4@2824.7,2771.02 2877,2771.03 R24.1@2885.34,2762.63 ; v1(2845,2802.63) 2845,2776.03 2850,2771.03 ; v1(2855,2517.63) CN7.5@2855.9,2479.53
I2C_SDA: CN7.6 pad.5@2775,2517.63 R25.1 U6.16 U7.3 | length 1003.7
  Top Layer w10: U6.16@2469.9,2998.53 2619.1,2998.53 2785,2832.63 v1(2785,2802.63) ; v1(2775,2517.63) 2775,2537.63 2835,2597.63 v1(2850,2597.63)
  Mid-Layer 1 w10: v1(2785,2802.63) 2830,2757.63 2830,2617.63 v1(2850,2597.63)
  Bottom Layer w10: v1(2775,2517.63) 2800,2517.63 2816.6,2501.03 CN7.6@2816.6,2479.53 ; v1(2785,2802.63) 2785,2757.63 2797.2,2745.43 U7.3@2824.7,2745.43 2842.5,2745.43 R25.1@2885.34,2702.63
L1_1: C5.2 L1.1 U2.6 | length 282.9
  Bottom Layer w15.75: U2.6@2072,2880.83 2111.8,2880.83 2130,2862.63 2130,2786.33 2130,2772.63 C5.2@2257.45,2772.63
LED: CN2.3 CN4.3 CN5.3 CN6.3 pad.5@2895,2397.63 U6.47 | length 3563.7
  Top Layer w10: v1(2045,2712.63) CN5.3@2095.7,2713.23 ; v1(2045,3282.63) 2085.6,3323.23 CN4.3@2095.7,3323.23 ; pad.5@2895,2397.63 v1(2895,2402.63) ; v1(2910,2802.63) 2935,2802.63 2952.2,2785.43 U6.47@2952.17,2752.52 ; CN2.3@3214.29,2792 v1(3295,2792.63) ; CN6.3@3214.29,3402 3245.6,3402.03 3295,3352.63 v1(3295,3307.63)
  Mid-Layer 1 w10: v1(2045,2712.63) 2045,2602.63 2065,2582.63 2165,2582.63 2310,2437.63 2895,2437.63 ; v1(2910,2802.63) 2940,2772.63 2940,2482.63 2895,2437.63 ; 2940,2562.63 3090,2562.63 3110,2582.63 3195,2582.63 3295,2682.63 v1(3295,2792.63) 3295,2892.63 3265,2922.63 3265,3022.63 3310,3067.63 3310,3292.63 v1(3295,3307.63) ; 2895,2437.63 v1(2895,2402.63) 2895,2437.63
  Mid-Layer 2 w10: v1(2045,2712.63) v1(2045,3282.63)
LED1: R27.2 U6.61 | length 92
  Top Layer w10: U6.61@3080.1,3018.23 3165.9,3018.23 R27.2@3170.34,3022.63
LED2: R28.2 U6.62 | length 124.4
  Top Layer w10: U6.62@3080.11,3037.94 3135.3,3037.93 3170.3,3072.93 R28.2@3170.34,3092.63
MOTOR1: R29.4 U6.92 | length 142.7
  Top Layer w10: U6.92@2696.26,3362.74 2696.3,3401.33 2710,3415.13 v1(2710,3427.63)
  Bottom Layer w10: R29.4@2664.53,3470.8 2681.8,3470.83 2710,3442.63 v1(2710,3427.63)
MOTOR2: R29.3 U6.93 | length 122.2
  Top Layer w10: v1(2675,3427.63) 2676.6,3427.63 U6.93@2676.57,3362.74
  Bottom Layer w10: R29.3@2644.84,3470.8 2644.8,3457.83 v1(2675,3427.63)
MOTOR3: R29.2 U6.95 | length 117
  Top Layer w10: U6.95@2637.2,3362.74 2637.2,3427.63 v1(2640,3427.63)
  Bottom Layer w10: R29.2@2625.16,3470.8 2625.2,3447.43 2640,3432.63 v1(2640,3427.63)
MOTOR4: R29.1 U6.96 | length 113.5
  Top Layer w10: v1(2605,3427.63) 2605,3412.63 2617.5,3400.13 U6.96@2617.52,3362.74
  Bottom Layer w10: v1(2605,3427.63) 2605,3470.33 R29.1@2605.47,3470.8
OSD_IN_CAM: C34.2 pad.5@2385,3712.63 R22.2 | length 708.1
  Top Layer w10: pad.5@2385,3712.63 2385,3697.63 2425,3657.63 2425,3542.63 2470,3497.63 v1(2470,3452.63)
  Mid-Layer 1 w10: v1(2470,3452.63) 2525,3397.63 2525,3177.63 v1(2555,3147.63)
  Bottom Layer w10: C34.2@2555,3110.18 R22.2@2555,3182.93
OSD_OUT_VTX: pad.5@2295,2517.63 R19.2 | length 785.9
  Top Layer w10: pad.5@2295,2517.63 2295,2532.63 v1(2335,2572.63)
  Mid-Layer 1 w10: v1(2335,2572.63) 2335,2637.63 2415,2717.63 2575,2717.63 2700,2842.63 2825,2842.63 v1(2850,2867.63)
  Bottom Layer w10: v1(2850,2867.63) 2859.7,2877.33 R19.2@2859.66,2902.63
Q2_1: Q2.1 R31.2 | length 147.9
  Bottom Layer w10: Q2.1@2869.8,2560.23 3010,2560.23 R31.2@3010,2567.93
R1_1: R1.1 U2.4 | length 84.5
  Bottom Layer w15.75: U2.4@2178.1,2855.23 2237.7,2855.23 R1.1@2255.34,2837.63
R1_2: C5.1 R1.2 | length 65.9
  Bottom Layer w15.75: C5.1@2312.55,2772.63 2314.7,2774.73 R1.2@2314.66,2837.63
R3_1: R3.1 U2.3 | length 84.2
  Bottom Layer w15.75: U2.3@2178.1,2880.83 2238.5,2880.83 R3.1@2255.34,2897.63
R7_1: C9.2 R7.1 U2.2 | length 199.4
  Bottom Layer w15.75: R7.1@2074.66,3007.63 C9.2@2137.45,3007.63 2137.4,2915.23 2146.2,2906.43 U2.2@2178.1,2906.43
R7_2: R7.2 U2.8 | length 99
  Bottom Layer w15.75: R7.2@2015.35,3007.63 2071.9,2951.03 U2.8@2071.9,2932.03
R8_1: R8.1 U2.1 | length 87.8
  Bottom Layer w15.75: U2.1@2178.1,2932.03 2229.7,2932.03 R8.1@2255.34,2957.63
R11_2: R11.2 R12.1 R14.2 | length 145.3
  Bottom Layer w15.75: R14.2@2314.66,3492.63 R11.2@2314.66,3432.63 R12.1@2375,3372.28
R12_2: C15.2 C16.2 D2.1 L2.2 R12.2 | length 426.5
  Bottom Layer w15.75: C15.2@2265.63,3092.63 2344.4,3171.33 C16.2@2344.37,3172.63 2360,3172.63 2360,3240.83 D2.1@2366.79,3247.63 2375,3247.63 R12.2@2375,3312.93
  Bottom Layer w23.62: L2.2@2130,3103.89 2130,3092.63 C15.2@2265.63,3092.63
R13_2: R8.2 R9.1 R13.2 | length 145.3
  Bottom Layer w15.75: R13.2@2314.66,3017.63 R8.2@2314.66,2957.63 R9.1@2375,2897.28
R27_1: LED1.1 R27.1 | length 46.8
  Top Layer w10: R27.1@3229.66,3022.63 LED1.1@3276.5,3022.63
R28_1: LED2.1 R28.1 | length 61.8
  Top Layer w10: R28.1@3229.66,3092.63 LED2.1@3291.5,3092.63
R29_5: R29.5 U11.6 | length 302.8
  Bottom Layer w10: U11.6@2464.68,3630.7 2464.7,3587.93 2480,3572.63 2640,3572.63 2664.5,3548.13 R29.5@2664.5,3504.43
R29_6: R29.6 U11.5 | length 313.9
  Bottom Layer w10: U11.5@2425.31,3630.7 2425.3,3587.33 2465,3547.63 2630,3547.63 2644.8,3532.83 R29.6@2644.8,3504.43
R29_7: R29.7 U11.4 | length 327.9
  Bottom Layer w10: U11.4@2385.94,3630.7 2385.9,3581.73 2440,3527.63 2615,3527.63 2625.2,3517.43 R29.7@2625.2,3504.43
R29_8: R29.8 U11.3 | length 343.3
  Bottom Layer w10: U11.3@2346.58,3630.7 2346.6,3576.03 2418.2,3504.43 R29.8@2605.5,3504.43
R30_5: CN3.6 R30.5 | length 202.7
  Bottom Layer w10: R30.5@2839.5,3504.43 2881.8,3504.43 2964.1,3586.73 CN3.6@2964.05,3630.7
R30_6: CN3.5 R30.6 | length 190.3
  Bottom Layer w10: R30.6@2819.8,3504.43 2819.8,3517.43 2830,3527.63 2865,3527.63 2924.7,3587.33 CN3.5@2924.68,3630.7
R30_7: CN3.4 R30.7 | length 176.2
  Bottom Layer w10: R30.7@2800.2,3504.43 2800.2,3527.83 2820,3547.63 2845,3547.63 2885.3,3587.93 CN3.4@2885.32,3630.7
R30_8: CN3.3 R30.8 | length 162.2
  Bottom Layer w10: R30.8@2780.5,3504.43 2780.5,3538.13 2810,3567.63 2825,3567.63 2845.9,3588.53 CN3.3@2845.95,3630.7
S$147824: 
S$244950: 
S$244954: 
S$288220: 
S$288224: 
S$288228: 
S$288280: 
S$288284: 
S$288288: 
S$288292: 
SBUS: CN1.1 pad.5@2735,2397.63 Q1.1 | length 517.4
  Top Layer w10: v1(2655,2597.63) 2655,2467.63 2665,2457.63 2695,2457.63 2735,2417.63 pad.5@2735,2397.63
  Bottom Layer w10: CN1.1@2493.4,2479.53 2493.4,2501.03 2590,2597.63 v1(2655,2597.63) 2669.8,2582.83 Q1.1@2669.8,2560.23